# Altium PCB buttonboard.PcbDoc
Units mm, origin at the board's own origin, x right, y up, seen from the top; angles counter-clockwise.
Board outline 77.5 x 25 mm, 2 copper layers (Top Layer, Bottom Layer), stack 1.671 mm thick; 5 components, 10 nets, 62 pads, 0 vias.
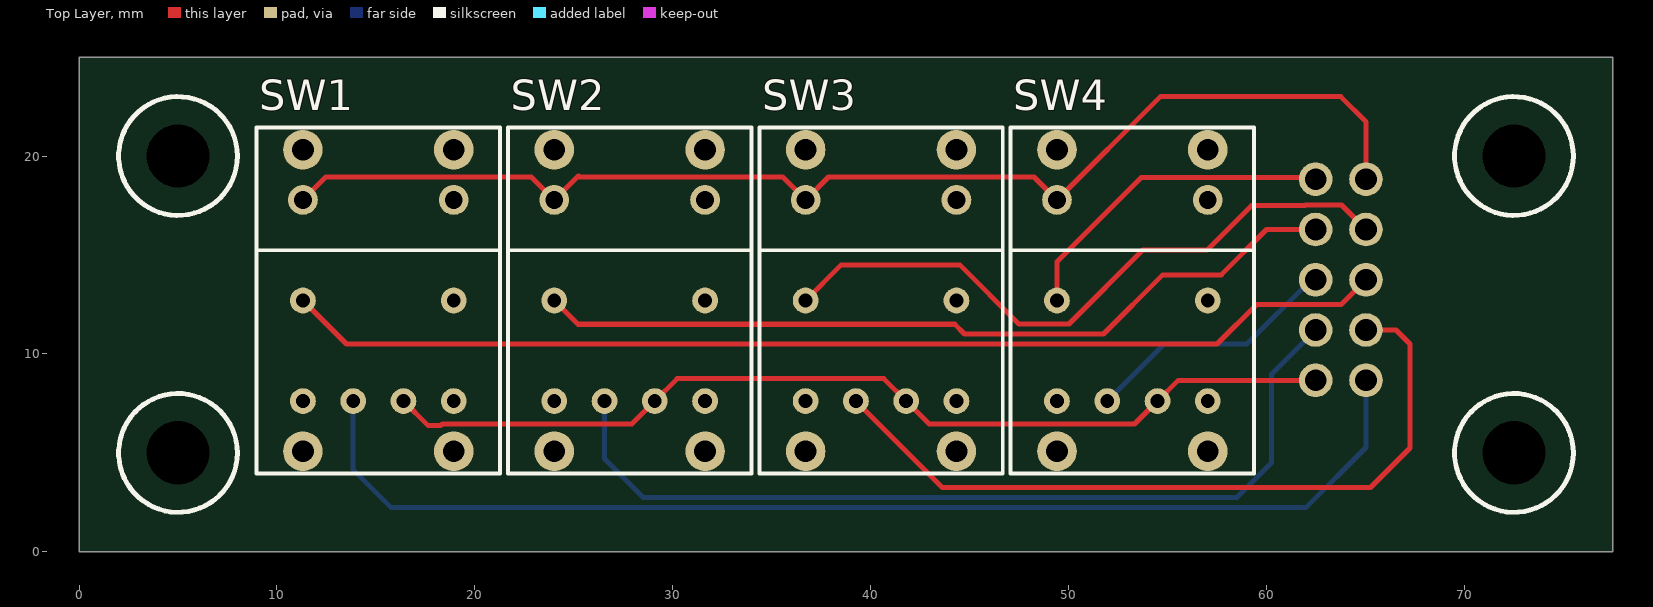
[diagram p0: Top Layer view]
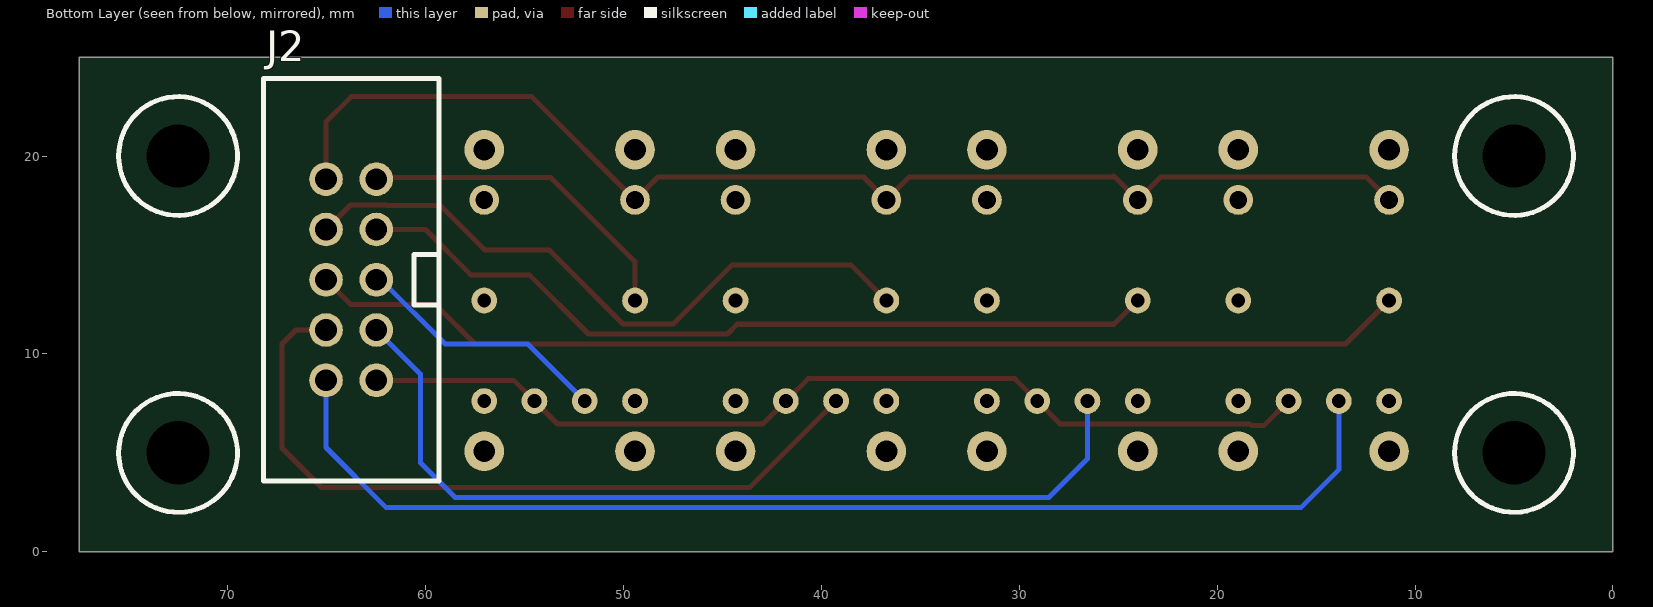
[diagram p1: Bottom Layer view, seen from below]
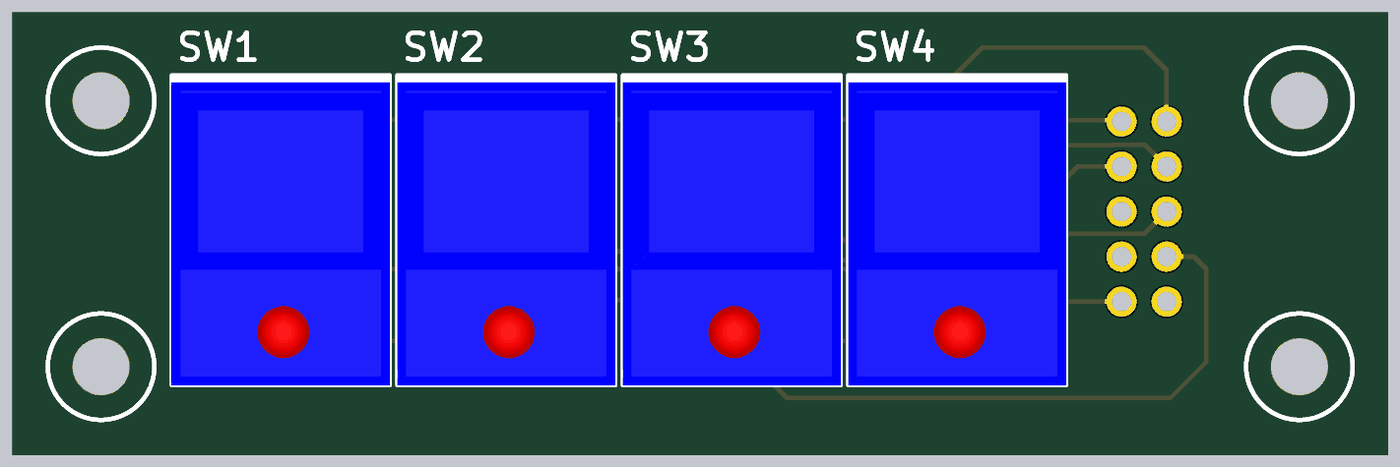
[diagram p2: 3D render of the assembled board from above, using the file's embedded part models]

## Layer stack, top to bottom
Top Layer: signal copper 0.0356
Dielectric: core 1.6, FR-4, Dk 4.8
Bottom Layer: signal copper 0.0356

## Board outline
0,0 0,25 77.5,25 77.5,0

## Design rules (kind name [scope] priority, off if disabled: settings)
Clearance [All] p1: gap=0.254
PolygonConnect [All] p1: connectstyle=Relief reliefconductorwidth=0.254 reliefentries=4 polygonreliefangle="90 Angle" airgapwidth=0.254
RoutingVias [All] p1: holewidth=0.711 width=1.27 viastyle="Through Hole" minholewidth=0.711 minwidth=1.27 maxholewidth=0.711 maxwidth=1.27
SolderMaskExpansion [All] p1: expansion=0.102
Width [All] p1: maxlimit=0.254 minlimit=0.254 preferedwidth=0.254
28 further rules are at their usual default settings.

## Components (designator, comment, footprint, x,y, rotation, side; value= is the part's Value field where it differs from the comment)
J2 "Wannenstecker 10pol 2,54mm" WSL10G 63.75,13.75 r90 bottom
SW1 "ITT_SER" ITT_SER 15.12,12.7 r90 top
SW2 "ITT_SER" ITT_SER 27.82,12.7 r90 top
SW3 "ITT_SER" ITT_SER 40.52,12.7 r90 top
SW4 "ITT_SER" ITT_SER 53.22,12.7 r90 top

## Footprints (in the part's own frame and the unit in brackets; to place one, negate y for a bottom-side part, rotate by r counter-clockwise, add the part's x,y. Pads: shape width x height; smd on the part's side, far side on the other; paste and mask are expansions set on the pad)
ITT_SER [mm]
  round 2 hole 1.1: 1(7.62,3.81) 2(7.62,-3.81) 11(-7.62,3.81) 12(-7.62,-3.81)
  round 1.5 hole 0.9: 3(5.08,3.81) 4(5.08,-3.81)
  round 1.3 hole 0.7: 5(0,3.81) 6(0,-3.81) 7(-5.08,3.81) 8(-5.08,1.27) 9(-5.08,-1.27) 10(-5.08,-3.81)
  silkscreen extent -8.75,-6.15 8.75,6.15, body extent -8.75,-6.15 8.75,6.15, height 13.5
WSL10G [mm]
  round 1.7 hole 1.1: 1(-5.08,-1.27) 2(-5.08,1.27) 3(-2.54,-1.27) 4(-2.54,1.27) 5(0,-1.27) 6(0,1.27) 7(2.54,-1.27) 8(2.54,1.27) 9(5.08,-1.27) 10(5.08,1.27)
  silkscreen extent -10.16,-4.43 10.16,4.43

## Part data
SW1 SW2 SW3 SW4: "Digitaster LED"

## Free pads (board coordinates)
  round 1 hole 3.2: 4(5,20) 5(72.5,20) 6(5,5) 7(72.5,5)

## Nets (pads, with @x,y where several pads share a name; then routed paths per layer and width w, separated by ;. In a path a pad name is that pad's centre, name@x,y a point inside that pad or via, vN(x,y) a via of type N, cw(c..) or ccw(c..) an arc to the next point about the centre after c; other vN are vias at no path point)
NetJ2_1: J2.1 SW1.9 SW2.9 SW3.9 SW4.9 | length 49.5
  Top Layer w0.254: SW1.9 17.636,6.374 18.271,6.374 18.358,6.461 27.931,6.461 SW2.9 30.22,8.75 40.66,8.75 SW3.9 42.949,6.461 53.331,6.461 SW4.9 55.54,8.67 J2.1
NetJ2_2: J2.2 SW1.8 | length 60.1
  Bottom Layer w0.254: SW1.8 13.85,4.15 15.75,2.25 62,2.25 65.02,5.27 J2.2
NetJ2_3: J2.3 SW2.8 | length 45.8
  Bottom Layer w0.254: SW2.8 26.55,4.7 28.492,2.758 58.508,2.758 60.25,4.5 60.25,8.98 J2.3
NetJ2_4: J2.4 SW3.8 | length 38.4
  Top Layer w0.254: SW3.8 43.62,3.25 65.25,3.25 67.25,5.25 67.25,10.5 66.54,11.21 J2.4
NetJ2_5: J2.5 SW4.8 | length 13.1
  Bottom Layer w0.254: SW4.8 54.83,10.5 59,10.5 62.25,13.75 J2.5
NetJ2_6: J2.6 SW1.5 | length 56
  Top Layer w0.254: SW1.5 13.51,10.5 57.5,10.5 59.5,12.5 63.77,12.5 J2.6
NetJ2_7: J2.7 SW2.5 | length 41.4
  Top Layer w0.254: SW2.5 25.21,11.5 44.25,11.5 44.742,11.008 51.758,11.008 54.75,14 57.71,14 60,16.29 J2.7
NetJ2_8: J2.8 SW3.5 | length 33.3
  Top Layer w0.254: SW3.5 38.51,14.5 44.5,14.5 47.484,11.516 50.016,11.516 53.75,15.25 57,15.25 59.25,17.5 61.949,17.5 61.97,17.521 63.789,17.521 J2.8
NetJ2_9: J2.9 SW4.5 | length 16.8
  Top Layer w0.254: SW4.5 49.41,14.66 53.661,18.911 62.399,18.911 J2.9
NetJ2_10: J2.10 SW1.3 SW2.3 SW3.3 SW4.3 | length 62.2
  Top Layer w0.254: SW1.3 12.469,18.939 22.851,18.939 SW2.3 25.23,19 25.291,18.939 35.551,18.939 SW3.3 37.869,18.939 48.251,18.939 SW4.3 54.63,23 63.75,23 65.02,21.73 J2.10
pads on no net: SW1.1 SW1.2 SW1.4 SW1.6 SW1.7 SW1.10 SW1.11 SW1.12 SW2.1 SW2.2 SW2.4 SW2.6 SW2.7 SW2.10 SW2.11 SW2.12 SW3.1 SW3.2 SW3.4 SW3.6 SW3.7 SW3.10 SW3.11 SW3.12 SW4.1 SW4.2 SW4.4 SW4.6 SW4.7 SW4.10 SW4.11 SW4.12

## Silkscreen, mask and mechanical layers (free items; w line width, h text height)
Top Overlay:
  circle w0.25: c5,20 r3
  circle w0.25: c72.5,20 r3
  circle w0.25: c72.5,5 r3
  circle w0.25: c5,5 r3
Bottom Overlay:
  circle w0.25: c5,5 r3
  circle w0.25: c72.5,5 r3
  circle w0.25: c72.5,20 r3
  circle w0.25: c5,20 r3